# Allegro board arduino.brd
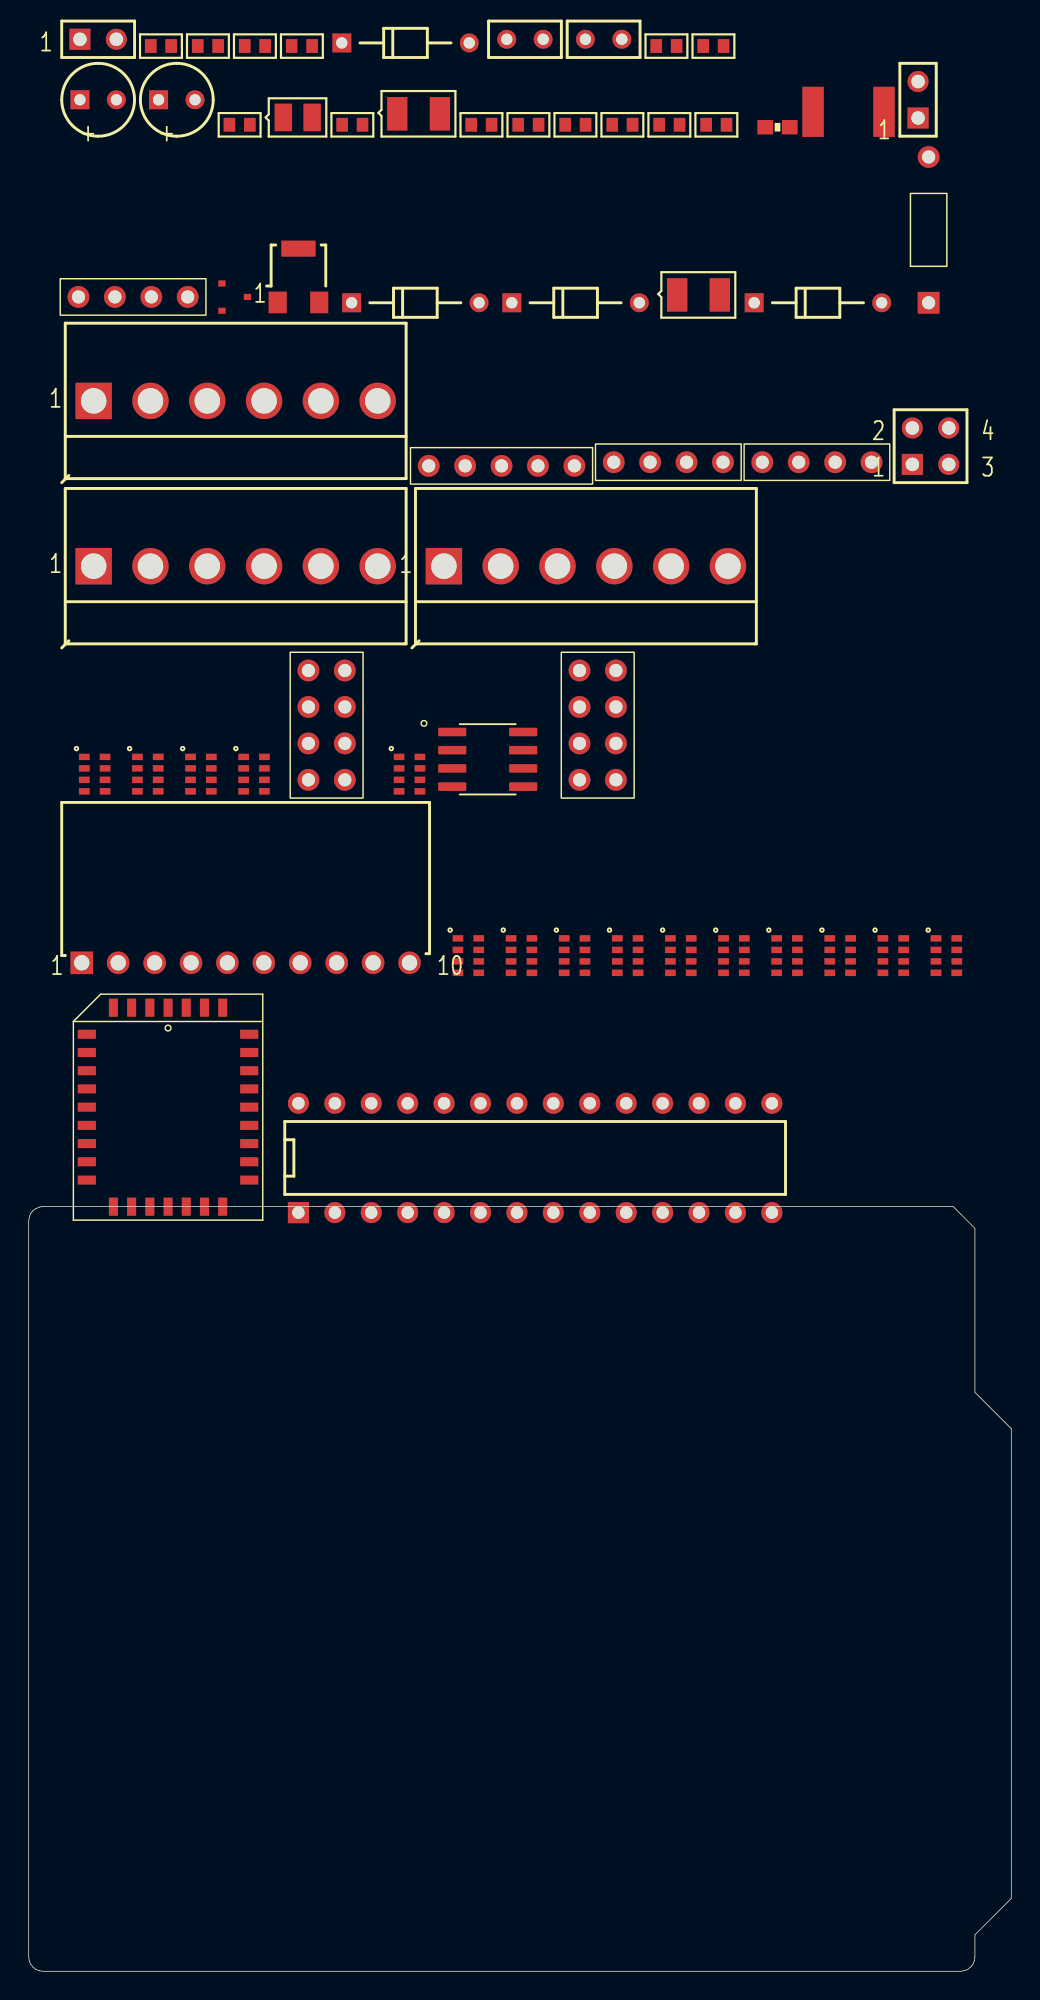
[diagram p0: board, top side]
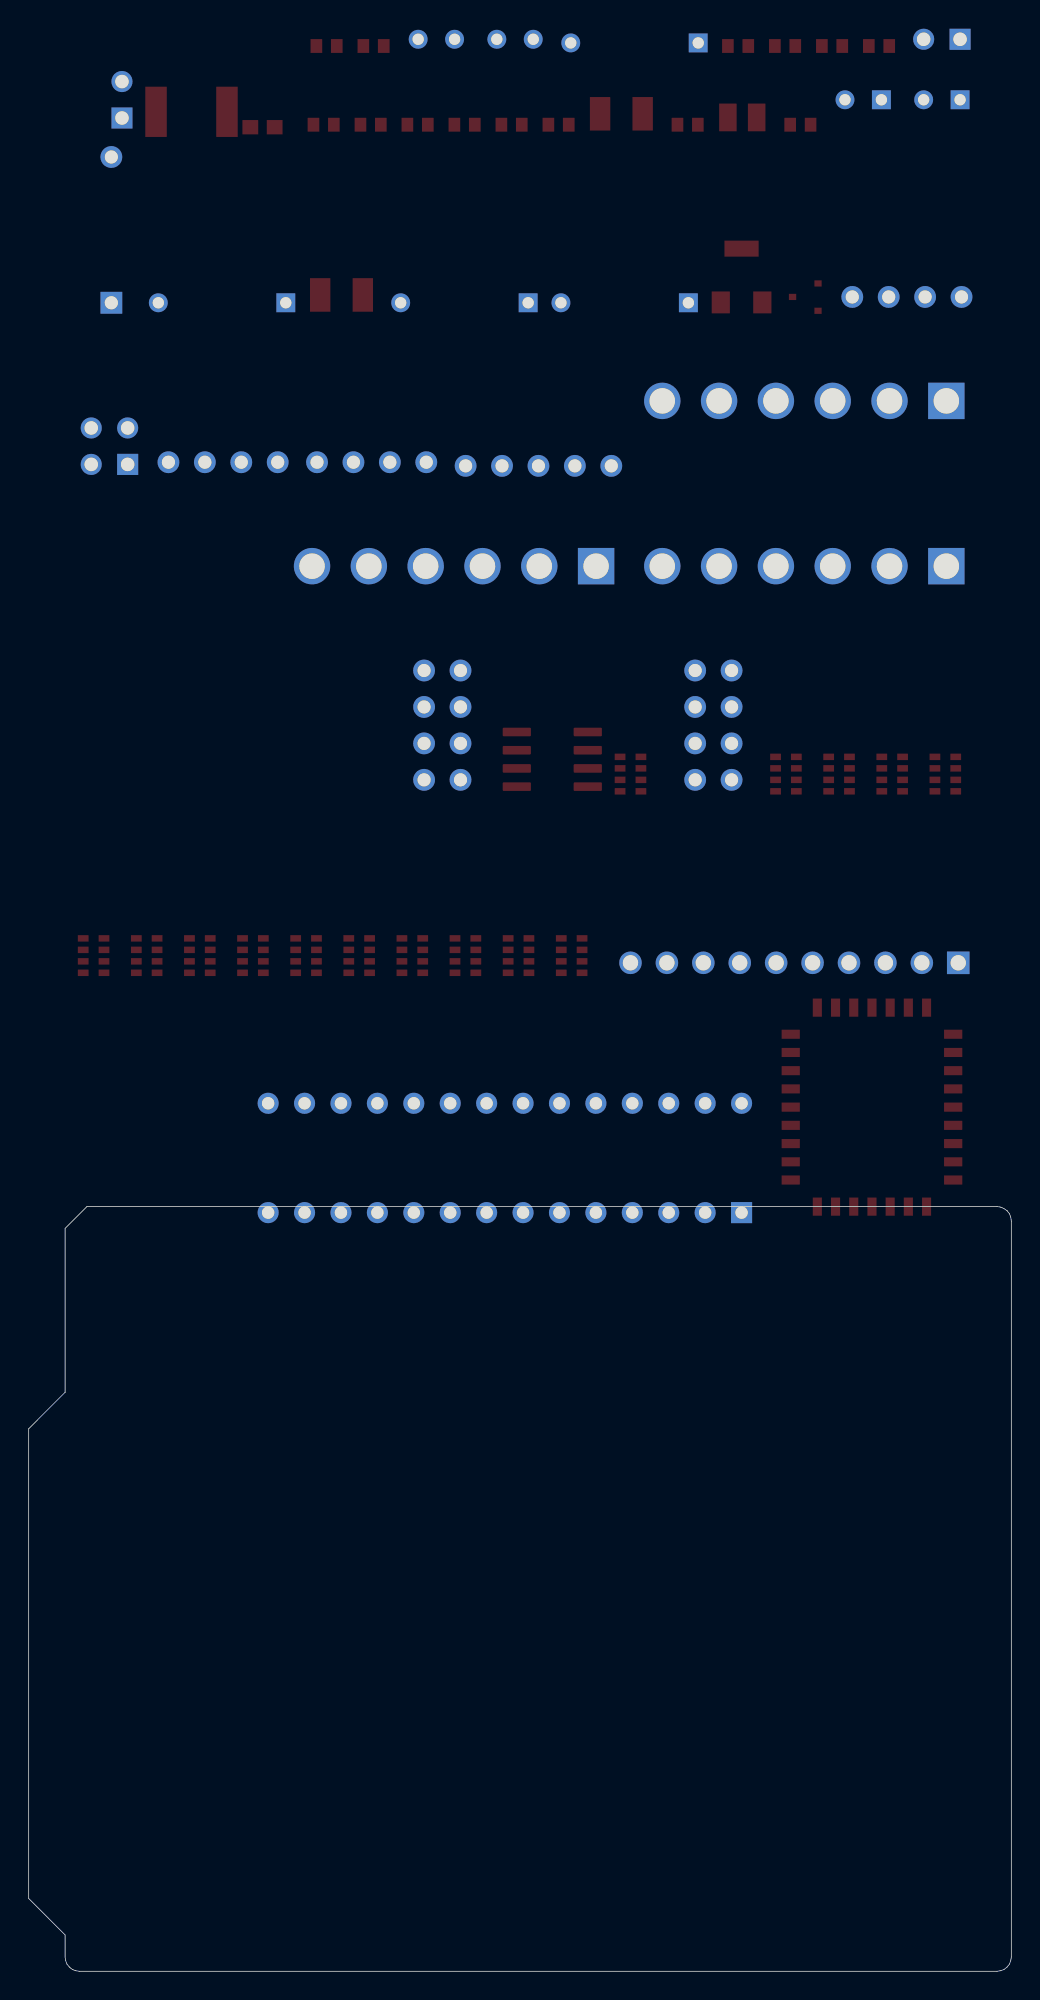
[diagram p1: board, bottom side, seen from below]

Outline 68.53 x 53.3 mm; copper layers: TOP, BOTTOM. Coordinates in mm from the lower left corner of the outline.
Outline path: 0,52.28 0,0.99 0.04,0.74 0.13,0.51 0.3,0.3 0.51,0.13 0.74,0.04 0.99,0 65,0 65.25,0.04 65.49,0.13 65.7,0.3 65.87,0.51 65.95,0.74 66,0.99 66,2.54 68.53,5.08 68.53,37.81 66,40.35 66,51.78 64.47,53.3 0.99,53.3 0.74,53.26 0.51,53.15 0.3,53 0.13,52.79 0.04,52.56 0,52.28

## Design rules (mm)
constraint set DEFAULT: min track width 0.127

## Placement (name value [footprint] x y rotation side)
C1  100n  [SMC0603]  18.34 134.18 0 top
C2  47u  [CPCYL1D200LS100031]  9.06 130.43 0 top
C3  100n  [SMC0603]  43.97 128.69 0 top
C4  47u  [CPCYL1D200LS100031]  3.57 130.43 0 top
C5  1u  [SMC0603]  14 128.69 0 top
C6  100n  [SMC0603]  40.7 128.69 0 top
C7  100n  [SMC0603]  37.42 128.69 0 top
C8  22P  [SMC0603]  11.79 134.18 0 top
C9  22P  [SMC0603]  21.86 128.69 0 top
C10  100n  [SMC0603]  15.07 134.18 0 top
C11  22P  [SMC0603]  34.14 128.69 0 top
C12  22P  [SMC0603]  30.87 128.69 0 top
C13  100n  [SMC0603]  47.25 128.69 0 top
C14  1u  [SMC0603]  8.52 134.18 0 top
D1  DIODE  [DIO400]  62.77 116.29 0 top
D2  GREEN ON  [DAX2350X080031]  59.49 116.29 0 top
D3  CD1206-S01575  [SMD120612]  45.23 116.83 0 top
D4  CD1206-S01575  [SMD120612]  25.71 129.46 0 top
F1  MF-MSMF050-2  [FUSESMD]  54.7 129.59 0 top
IC1  ATmega328P-PU  [DIP10028W300L1375]  18.81 52.87 0 top
IC2  ATMEGA16U2-MU(R)  [LCC32]  9.72 60.23 0 top
J1  POWER  [JUMPER8]  38.42 83.04 0 top
J2  ICSP  [POLCON156VHTM1SQSW4256]  28.96 97.93 0 top
J3  CON6A  [POLCON156VHTM1SQSW4256]  4.53 109.45 0 top
J4  SIPSOC-10  [POLCON100RHTM1SQSW44010]  3.7 70.29 0 top
J5  SIPSOC-6  [POLCON156VHTM1SQSW4256]  4.53 97.93 0 top
J6  CON4  [JUMPER4]  51.17 105.17 0 top
J7  SIPSOC-8  [JUMPER8]  19.51 83.04 0 top
JP1  2X2M-MM  [JUMPER4]  40.8 105.17 0 top
L1  BLM21  [SMD080512]  17.76 129.2 0 top
LED1  YELLOW  [DAX2350X080031]  42.59 116.29 0 top
LED2  YELLOW  [DAX2350X080031]  30.73 134.4 0 top
LED3  YELLOW  [DAX2350X080031]  31.41 116.29 0 top
R1  10K  [CAY16-J4]  15.72 83.44 0 top
R2  1K  [CAY16-J4]  41.78 70.79 0 top
R3  10K  [CAY16-J4]  12.01 83.44 0 top
R4  1K  [CAY16-J4]  34.37 70.79 0 top
R5  1K  [CAY16-J4]  30.66 70.79 0 top
R6  10K  [CAY16-J4]  8.31 83.44 0 top
R7  10K  [CAY16-J4]  4.6 83.44 0 top
R8  1meg  [CAY16-J4]  64.01 70.79 0 top
R9  22R  [CAY16-J4]  60.3 70.79 0 top
R10  22R  [CAY16-J4]  26.56 83.44 0 top
R11  1meg  [CAY16-J4]  56.6 70.79 0 top
R12  1K  [CAY16-J4]  49.19 70.79 0 top
R13  1K  [CAY16-J4]  45.48 70.79 0 top
R14  1K  [CAY16-J4]  52.89 70.79 0 top
R15  R  [0603-NO]  52.23 128.52 0 top
R16  1K  [CAY16-J4]  38.07 70.79 0 top
SW1  SW PUSHBUTTON-SPST-2  [BLKCON100VHTM2OEW2004]  61.63 105.02 0 top
SW2  RESET-EN  [BLKCON100VHTM2OEW2002]  62.03 129.16 0 top
SW3  SW MAG-SPST  [BLKCON100VHTM1SQW1002]  3.57 134.65 0 top
T1  FDN340P  [SOT23]  14.37 116.69 0 top
U3  NCP1117ST50T3G  [JUMPER4]  3.47 116.69 0 top
U4  LP2985-33DBVR  [JUMPER5]  27.9 104.92 0 top
U5  LMV358IDGKR  [SOIC127P600X175-8N]  32.02 84.47 0 top
X1  POWERSUPPLY_NC21MMX  [VRES57]  17.37 116.31 0 top
Y1  CSTCE16MOV53-R0  [RAD200X100LS100031]  33.34 134.65 0 top
Y2  16MHz  [RAD200X100LS100031]  38.83 134.65 0 top
Z1  CG0603MLC-05E  [SMR0603]  43.77 134.18 0 top
Z2  CG0603MLC-05E  [SMR0603]  47.05 134.18 0 top

## Library data of the parts
C1 C3 C5-C14 = CAP NP
C2 C4 = CAP POL
D1 D3 D4 = DIODE
D2 LED1-LED3 = LED
F1 = FUSE
IC1 = ATMega8-TQFP32_0
IC2 = ATMega8-TQFP32_0: Tolerance: ***; User Part Number: ***
J1 J7 = SIPSOC-8: User Part Number: ***
J2 J3 = CON6A
J4 = SIPSOC-10
J5 = SIPSOC-6
J6 = CON4: User Part Number: ***
JP1 = CON4A: User Part Number: ***
L1 = BEAD
R1-R16 = R
SW1 = SW PUSHBUTTON-SPST-2_0
SW2 SW3 = SW MAG-SPST
T1 = MOSFET P SGD
U3 = CON4A_2: User Part Number: ***
U4 = LP2985: User Part Number: ***
U5 = OPAMP DUAL SUPPLY_3
X1 = CON3_0
Y1 Y2 = ZTA
Z1 Z2 = VARISTOR

## Footprints (pads in the part's own frame, mm; a bottom-side part is the same pattern mirrored in y, then rotated)
0603-NO
  rect 1.1x1 smd: 1(-0.85,0) 2(0.85,0)
BLKCON100VHTM1SQW1002
  rect 1.473x1.473 hole 0.94: 1(0,0)
  round 1.473 hole 0.94: 2(2.54,0)
BLKCON100VHTM2OEW2002
  rect 1.473x1.473 hole 0.94: 1(0,0)
  round 1.473 hole 0.94: 2(0,2.54)
BLKCON100VHTM2OEW2004
  rect 1.473x1.473 hole 0.94: 1(0,0)
  round 1.473 hole 0.94: 2(0,2.54) 3(2.54,0) 4(2.54,2.54)
CAY16-J4
  rect 0.75x0.45 smd: 1(-0.725,1.2) 2(-0.725,0.4) 3(-0.725,-0.4) 4(-0.725,-1.2) 5(0.725,-1.2) 6(0.725,-0.4) 7(0.725,0.4) 8(0.725,1.2)
CPCYL1D200LS100031
  rect 1.321x1.321 hole 0.787: 1(0,0)
  round 1.321 hole 0.787: 2(2.54,0)
DAX2350X080031
  round 1.321 hole 0.787: 1(0,0)
  rect 1.321x1.321 hole 0.787: 2(-8.89,0)
DIO400
  rect 1.524x1.524 hole 0.914: 1(0,0)
  round 1.524 hole 0.914: 2(0,10.16)
DIP10028W300L1375
  rect 1.473x1.473 hole 0.864: 1(0,0)
  round 1.473 hole 0.864: 2(2.54,0) 3(5.08,0) 4(7.62,0) 5(10.16,0) 6(12.7,0) 7(15.24,0) 8(17.78,0) 9(20.32,0) 10(22.86,0) 11(25.4,0) 12(27.94,0) 13(30.48,0) 14(33.02,0) 15(33.02,7.62) 16(30.48,7.62) 17(27.94,7.62) 18(25.4,7.62) 19(22.86,7.62) 20(20.32,7.62) 21(17.78,7.62) 22(15.24,7.62) 23(12.7,7.62) 24(10.16,7.62) 25(7.62,7.62) 26(5.08,7.62) 27(2.54,7.62) 28(0,7.62)
FUSESMD
  rect 1.5x3.5 smd: 1(0,0) 2(4.95,0)
JUMPER4
  round 1.524 hole 0.914: 1(0,0) 2(2.54,0) 3(5.08,0) 4(7.62,0)
JUMPER5
  round 1.524 hole 0.914: 1(0,0) 2(2.54,0) 3(5.08,0) 4(7.62,0) 5(10.16,0)
JUMPER8
  round 1.524 hole 0.914: 1(0,0) 2(2.54,0) 3(0,2.54) 4(2.54,2.54) 5(0,5.08) 6(2.54,5.08) 7(0,7.62) 8(2.54,7.62)
LCC32
  rect 0.635x1.27 smd: 1(0,6.934) 2(-1.27,6.934) 3(-2.54,6.934) 4(-3.81,6.934) 14(-3.81,-6.934) 15(-2.54,-6.934) 16(-1.27,-6.934) 17(0,-6.934) 18(1.27,-6.934) 19(2.54,-6.934) 20(3.81,-6.934) 30(3.81,6.934) 31(2.54,6.934) 32(1.27,6.934)
  rect 1.27x0.635 smd: 5(-5.664,5.08) 6(-5.664,3.81) 7(-5.664,2.54) 8(-5.664,1.27) 9(-5.664,0) 10(-5.664,-1.27) 11(-5.664,-2.54) 12(-5.664,-3.81) 13(-5.664,-5.08) 21(5.664,-5.08) 22(5.664,-3.81) 23(5.664,-2.54) 24(5.664,-1.27) 25(5.664,0) 26(5.664,1.27) 27(5.664,2.54) 28(5.664,3.81) 29(5.664,5.08)
POLCON100RHTM1SQSW44010
  rect 1.575x1.575 hole 1.067: 1(0,0)
  round 1.575 hole 1.067: 2(2.54,0) 3(5.08,0) 4(7.62,0) 5(10.16,0) 6(12.7,0) 7(15.24,0) 8(17.78,0) 9(20.32,0) 10(22.86,0)
POLCON156VHTM1SQSW4256
  rect 2.54x2.54 hole 1.778: 1(0,0)
  round 2.54 hole 1.778: 2(3.962,0) 3(7.925,0) 4(11.887,0) 5(15.85,0) 6(19.812,0)
RAD200X100LS100031
  round 1.321 hole 0.787: 1(0,0) 2(2.54,0)
SMC0603
  rect 0.813x0.965 smd: 1(0,0) 2(1.422,0)
SMD080512
  rect 1.219x1.93 smd: 1(0,0) 2(2.007,0)
SMD120612
  rect 1.422x2.337 smd: 1(0,0) 2(2.972,0)
SMR0603
  rect 0.813x0.965 smd: 1(0,0) 2(1.422,0)
SOIC127P600X175-8N
  custom 1.97x0.6 smd: 1(-2.475,1.905) 2(-2.475,0.635) 3(-2.475,-0.635) 4(-2.475,-1.905) 5(2.475,-1.905) 6(2.475,-0.635) 7(2.475,0.635) 8(2.475,1.905)
SOT23
  rect 0.508x0.432 smd: 1(-0.889,0.94) 2(-0.889,-0.965) 3(0.889,0)
VRES57
  rect 1.27x1.524 smd: 1(0,0) 2(2.896,0)
  rect 2.388x1.118 smd: 3(1.448,3.747)

## Nets
+3V3: C5.1 J1.4 U4.5(OUT) U5.6
+5V: C1.1 IC1.7 IC1.20 IC2.32 J1.2 J1.5 J2.2 J3.2 R4.1 R5.1 R6.1 R7.1 R13.2 R14.2 T1.1(S) U3.2 U3.4(OUT) U4.1 U4.3
GND: C1.2 C5.2 D2.1(CATHODE) IC1.8 IC1.22 IC2.3 J1.6 J1.7 J1.8 J2.6 J3.6 J4.7 LED1.1(CATHODE) R1.1 R3.2 R12.2 SW1.1 SW1.2 SW3.2 U3.1 U4.2 X1.1 X1.3
AD0: IC1.23 J5.1
AD1: IC1.24 J5.2
AD2: IC1.25 J5.3
AD3: IC1.26 J5.4
AD4/SDA: IC1.27 J4.9 J5.5
AD5/SCL: IC1.28 J4.10 J5.6
AREF: IC1.21 J4.8
CMP: R1.2 R3.1 U5.5
GROUND: IC2.28 J6.4 L1.1 SW3.1
L13: R2.1 U5.1 U5.2
M8RXD: IC2.9 R15.1
M8TXD: IC2.8 R16.1
MISO: IC1.18 J2.1 J4.5
MISO2: IC2.17 J3.1
MOSI: C6.1 C6.2 IC1.17 J2.4 J4.4
MOSI2: IC2.16 IC2.18 IC2.19 J3.4 JP1.1 JP1.3
PB6: IC2.20 JP1.2
PB7: IC2.21 JP1.4
PWRIN: X1.2
RD+: IC2.4 IC2.29 R10.2
RD-: IC2.30 R9.2
RESET: IC1.1 J1.3 J2.5 R6.2 SW1.3 SW1.4 SW2.1 SW2.2
RESET2: IC2.24 J3.5 R7.2
RXLED: IC2.10 LED3.1(CATHODE)
SCK: IC1.19 J2.3 J4.6 U5.3
SCK2: IC2.15 J3.3
SS: IC1.16 J4.3
TP_VUCAP: IC2.27
TXLED: IC2.11 LED2.1(CATHODE)
USB BOOT EN: IC2.13 R12.1
USBVCC: F1.2 IC2.31 T1.3
V+: U5.8
V-: U5.4
XT1: IC2.1 R11.2 Y2.1
XT2: IC2.2(XTAL2(PC0)) R11.1 Y2.2
XTAL1: IC1.9 R8.2 Y1.1
XTAL2: IC1.10(XTAL2) R8.1 Y1.2
XUSB: F1.1 J6.1
N22561: T1.2 U5.7(OUT)
N22877: U3.3
N22955: IC1.14 J4.1
N23007: IC1.15 J4.2
N23087: IC1.13 J7.8
N23127: IC1.12 J7.7
N23139: IC1.6 J7.5
N23143: IC1.11 J7.6
N23155: IC1.5 J7.4
N23175: IC1.4 J7.3
N23187: IC1.2 J7.1 R15.2
N23191: IC1.3 J7.2 R16.2
N24107: LED3.2 R14.1
N24725: J6.2 R9.1 Z2.1
N24753: J6.3 R10.1 Z1.1
N24849: L1.2 Z1.2 Z2.2
N30470: D2.2 R4.2 R5.2
N226431: LED1.2 R2.2
N228690: D1.1(K) D1.2
N229010: C4.1 C4.2
N234490: D3.1(K) D3.2
N235890: C8.1 C8.2
N236050: C9.1 C9.2
N237010: C7.1 C7.2
N238830: C10.1 C10.2
N240430: LED2.2 R13.1
N243610: D4.1(K) D4.2
N244810: C11.1 C11.2
N245050: C12.1 C12.2
N245690: C13.1 C13.2
N246230: C14.1 C14.2
N249270: C3.1 C3.2
N290960: C2.1 C2.2

Pads without a net: IC2 5 6 7 12 14 22 23 25 26; J1 1; R1 3 4 5 6 7 8; R2 3 4 5 6 7 8; R3 3 4 5 6 7 8; R4 3 4 5 6 7 8; R5 3 4 5 6 7 8; R6 3 4 5 6 7 8; R7 3 4 5 6 7 8; R8 3 4 5 6 7 8; R9 3 4 5 6 7 8; R10 3 4 5 6 7 8; R11 3 4 5 6 7 8; R12 3 4 5 6 7 8; R13 3 4 5 6 7 8; R14 3 4 5 6 7 8; R16 3 4 5 6 7 8; U4 4
